# EAGLE board untitled (EAGLE 9.6.2)
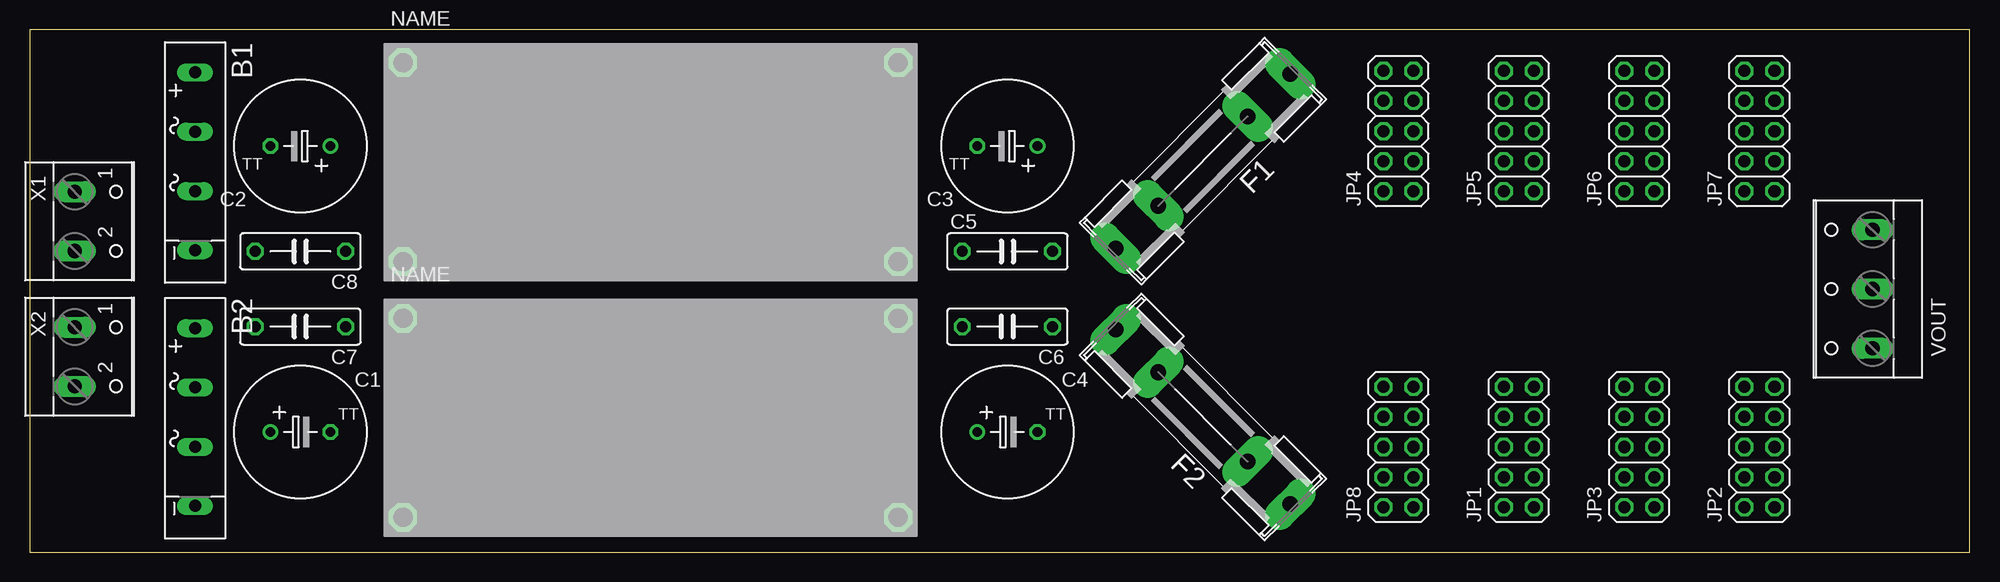
[diagram p0: board, top side]
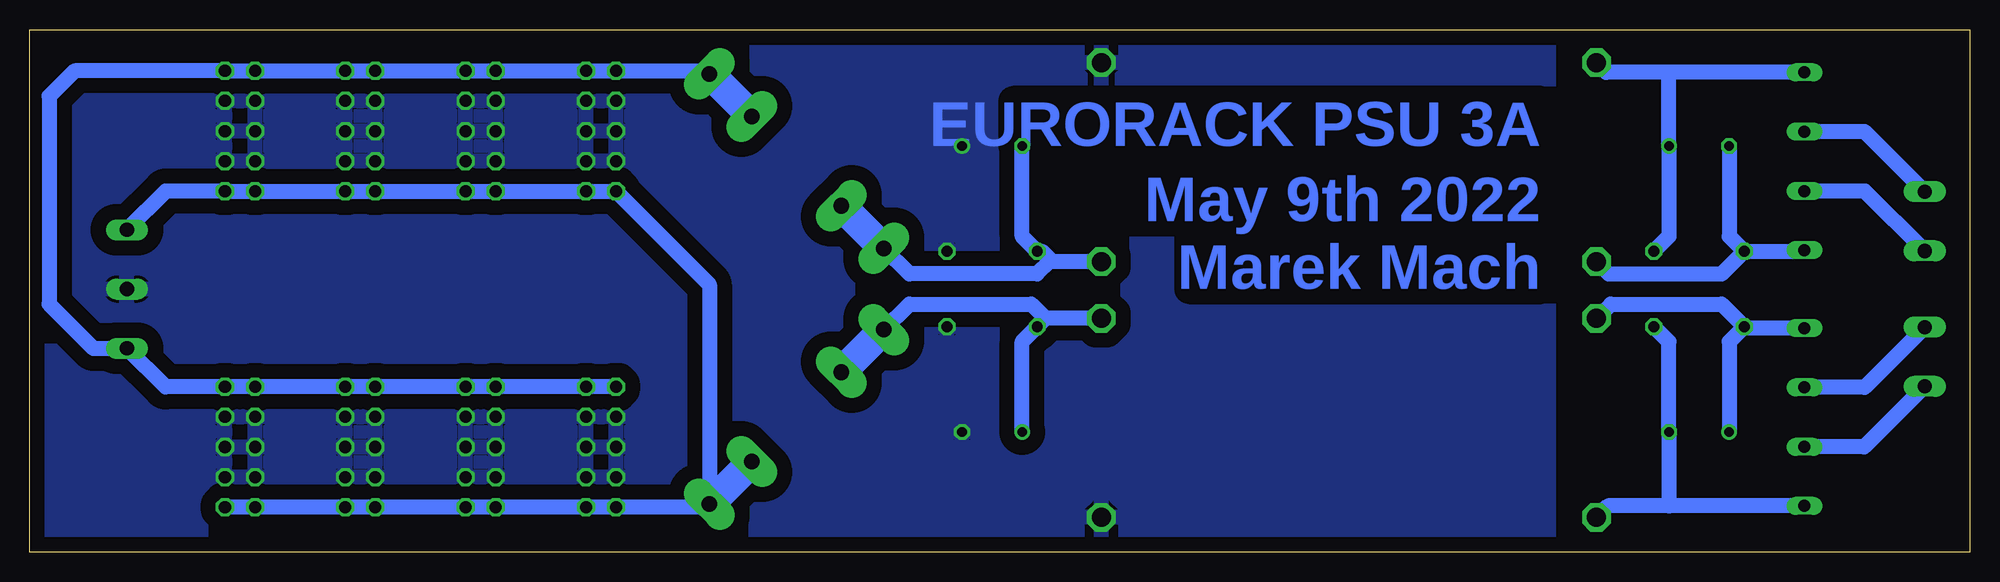
[diagram p1: board, bottom side, seen from below]

Size 163.81 x 44.12 mm. Coordinates in mm from the lower left corner, seen from the top.
Outline: 0,0 163.81,0 163.81,44.12 0,44.12 0,0
Copper layers (1*16): Top 0.035mm / dielectric 1.5mm / Bottom 0.035mm
Design rules "default": minimum track width 6mil, minimum drill 0.35mm, track to track 6mil, track to pad 6mil, pad to pad 6mil, via to via 6mil, smd to smd 6mil, copper to edge 40mil, drill to drill 6mil, minimum pad ring 10mil, minimum via ring 8mil, stop-mask expansion 4mil, vias tented up to drill 0mil, thermal gap 10mil

## Footprints (pad centres in the part's own frame; a part is rotated, then mirrored left to right if it is on the bottom)
FB15 = drill 1.016 long: + -7.5,0; - 7.511,0; AC1 -2.496,0; AC2 2.533,0
TT5D11 = drill 0.813: + -2.54,0 | drill 0.813 octagon: - 2.54,0
C075-032X103 = drill 0.914 octagon: 1 -3.81,0; 2 3.81,0
SHK20L = drill 1.321 pad 2.54 long: 1A -10.414,0; 1B -5.334,0; 2A 10.414,0; 2B 5.334,0
2X05 = drill 1.016 octagon: 1 -5.08,-1.27; 2 -5.08,1.27; 3 -2.54,-1.27; 4 -2.54,1.27; 5 0,-1.27; 6 0,1.27; 7 2.54,-1.27; 8 2.54,1.27; 9 5.08,-1.27; 10 5.08,1.27
CP8-ADJ = drill 1.6 octagon: IN+ -21.81,7.05; IN- -21.81,-9.75; OUT+ 19.99,7.05; OUT- 19.99,-9.75
W237-103 = drill 1.194 long: 1 -5,-1.29; 2 0,-1.29; 3 5,-1.29
W237-102 = drill 1.194 long: 1 -2.5,-1.27; 2 2.5,-1.27

## Placement (x,y rotation side)
B1  [FB15]  13.97,33.02 270 top
B2  [FB15]  13.97,11.43 270 top
C1  1000uf  [TT5D11]  22.86,10.16 0 top
C2  1000uf  [TT5D11]  22.86,34.29 180 top
C3  1000uf  [TT5D11]  82.55,34.29 180 top
C4  1000uf  [TT5D11]  82.55,10.16 0 top
C5  100n  [C075-032X103]  82.55,25.4 0 top
C6  100n  [C075-032X103]  82.55,19.05 180 top
C7  100n  [C075-032X103]  22.86,19.05 180 top
C8  100n  [C075-032X103]  22.86,25.4 180 top
F1  3A  [SHK20L]  99.06,33.02 225 top
F2  3A  [SHK20L]  99.06,11.43 135 top
JP1  [2X05]  125.73,8.89 90 top
JP2  [2X05]  146.05,8.89 90 top
JP3  [2X05]  135.89,8.89 90 top
JP4  [2X05]  115.57,35.56 90 top
JP5  [2X05]  125.73,35.56 90 top
JP6  [2X05]  135.89,35.56 90 top
JP7  [2X05]  146.05,35.56 90 top
JP8  [2X05]  115.57,8.89 90 top
PWM_DC-DC_3A_REGULATOR1  CP8-ADJ  [CP8-ADJ]  53.34,34.29 0 top
PWM_DC-DC_3A_REGULATOR2  CP8-ADJ  [CP8-ADJ]  53.34,12.7 0 top
VOUT  [W237-103]  154.31,22.23 90 top
X1  [W237-102]  5.08,27.94 270 top
X2  [W237-102]  5.08,16.51 270 top

## Library data of the parts
B1 B2 = rectifier
C1-C8 = resistor
F1 F2 = fuse; OC_FARNELL: unknown; OC_NEWARK: unknown
JP1-JP8 = pinhead
PWM_DC-DC_3A_REGULATOR1 PWM_DC-DC_3A_REGULATOR2 = regulators
VOUT = con-wago-500; MPN: 237-103; OC_FARNELL: unknown; OC_NEWARK: 18M7116
X1 X2 = con-wago-500; MPN: 237-102; OC_FARNELL: unknown; OC_NEWARK: 70K9898

## Nets
+12V: F2.1A F2.1B JP1.1 JP1.2 JP2.1 JP2.2 JP3.1 JP3.2 JP4.1 JP4.2 JP5.1 JP5.2 JP6.1 JP6.2 JP7.1 JP7.2 JP8.1 JP8.2 VOUT.3
-12V: F1.1A F1.1B JP1.9 JP1.10 JP2.9 JP2.10 JP3.9 JP3.10 JP4.9 JP4.10 JP5.9 JP5.10 JP6.9 JP6.10 JP7.9 JP7.10 JP8.9 JP8.10 VOUT.1
GND: C3.+ C4.- C5.2 C6.1 JP1.3 JP1.4 JP1.5 JP1.6 JP1.7 JP1.8 JP2.3 JP2.4 JP2.5 JP2.6 JP2.7 JP2.8 JP3.3 JP3.4 JP3.5 JP3.6 JP3.7 JP3.8 JP4.3 JP4.4 JP4.5 JP4.6 JP4.7 JP4.8 JP5.3 JP5.4 JP5.5 JP5.6 JP5.7 JP5.8 JP6.3 JP6.4 JP6.5 JP6.6 JP6.7 JP6.8 JP7.3 JP7.4 JP7.5 JP7.6 JP7.7 JP7.8 JP8.3 JP8.4 JP8.5 JP8.6 JP8.7 JP8.8 PWM_DC-DC_3A_REGULATOR1.OUT+ PWM_DC-DC_3A_REGULATOR2.OUT- VOUT.2
N$1: B2.+ C1.+ C7.2 PWM_DC-DC_3A_REGULATOR2.IN+
N$2: B1.- C2.- C8.2 PWM_DC-DC_3A_REGULATOR1.IN-
N$4: B2.- C1.- C7.1 PWM_DC-DC_3A_REGULATOR2.IN-
N$5: C4.+ C6.2 F2.2A F2.2B PWM_DC-DC_3A_REGULATOR2.OUT+
N$6: C3.- C5.1 F1.2A F1.2B PWM_DC-DC_3A_REGULATOR1.OUT-
N$7: B1.AC2 X1.2
N$8: B2.AC2 X2.2
N$9: B1.AC1 X1.1
N$10: B2.AC1 X2.1
N$11: B1.+ C2.+ C8.1 PWM_DC-DC_3A_REGULATOR1.IN+

## Tracks (layer width: path | path; a pad name or v marks a point on that pad's centre or on a via)
+12V
  Bottom 0.813: JP7.1 JP7.2 JP6.1 JP6.2 JP5.1 JP5.2 JP4.1 JP4.2 | JP2.1 JP2.2 JP3.1 JP3.2 JP1.1 JP1.2 JP8.1 JP8.2 106.68,3.81
  Bottom 1.27: JP7.1 JP4.2 106.42,22.6 F2.1A 106.68,3.81 JP2.1 | JP7.1 147.32,30.44 | JP7.1 152.34,30.48 VOUT.3
  Bottom 2.54: F2.1B F2.1A
-12V
  Bottom 0.813: JP7.10 JP6.9 JP6.10 JP5.9 JP5.10 JP4.9 JP4.10 106.68,40.64 F1.1A | 102.87,36.83 F1.1B | JP2.9 JP2.10 JP3.9 JP3.10 JP1.9
  Bottom 1.27: 106.68,40.64 JP7.10 JP7.9 160.02,40.64 162.16,38.5 162.16,20.95 158.43,17.23 VOUT.1 152.34,13.97 JP2.9 JP1.9 JP1.10 JP8.9 JP8.10
  Bottom 2.54: F1.1A 102.87,36.83
GND
  pour Bottom (isolate 1.27): 35.56,44.45 163.83,44.45 163.83,-0.64 35.56,-0.64 35.56,0
N$1
  Bottom 0.813: 18.93,18.93 C7.2
  Bottom 1.27: B2.+ 18.93,18.93 | PWM_DC-DC_3A_REGULATOR2.IN+ 30.32,20.95 20.95,20.95 C7.2 20.32,17.78 C1.+
N$2
  Bottom 0.813: 14.08,25.4 B1.-
  Bottom 1.27: C2.- 20.32,26.67 C8.2 | C8.2 14.08,25.4 | PWM_DC-DC_3A_REGULATOR1.IN- 30.48,23.5 20.95,23.5 C8.2
N$4
  Bottom 1.27: B2.- 25.4,3.92 | 25.4,3.92 30.56,3.92 PWM_DC-DC_3A_REGULATOR2.IN- | 25.4,3.92 C1.- 25.4,17.78 C7.1
N$5
  Bottom 0.813: 95.25,15.24 F2.2B
  Bottom 1.27: F2.2A 89.53,20.95 79.25,20.95 78.04,19.75 | PWM_DC-DC_3A_REGULATOR2.OUT+ 78.04,19.75 | 78.04,19.75 C6.2 80.01,17.78 C4.+
  Bottom 2.54: F2.2A 95.25,15.24
N$6
  Bottom 0.813: PWM_DC-DC_3A_REGULATOR1.OUT- 77.47,24.54 77.88,24.54 C5.1
  Bottom 1.27: PWM_DC-DC_3A_REGULATOR1.OUT- 77.88,24.54 | C3.- 80.01,26.67 C5.1 78.33,25.4 77.47,24.54 77.69,24.54 78.74,23.5 89.53,23.5 F1.2A
  Bottom 2.54: F1.2B F1.2A
N$7
  Bottom 1.27: X1.2 8.86,30.49 B1.AC2
N$8
  Bottom 1.27: X2.2 8.92,8.9 B2.AC2
N$9
  Bottom 1.27: X1.1 8.89,35.52 B1.AC1
N$10
  Bottom 1.27: X2.1 8.89,13.93 B2.AC1
N$11
  Bottom 1.27: C8.1 25.4,26.67 C2.+ 25.4,40.52 | B1.+ 25.4,40.52 | 25.4,40.52 30.71,40.52 PWM_DC-DC_3A_REGULATOR1.IN+

## Text on the board
Bottom: EURORACK PSU 3A | May 9th 2022 | Marek Mach